# Altium PCB Digital-WeighingScale.PcbDoc
Units mm, origin at the board's own origin, x right, y up, seen from the top; angles counter-clockwise.
Board outline 32.5 x 55 mm, 2 copper layers (Top Layer, Bottom Layer); 16 components, 27 nets, 89 pads, 7 vias.
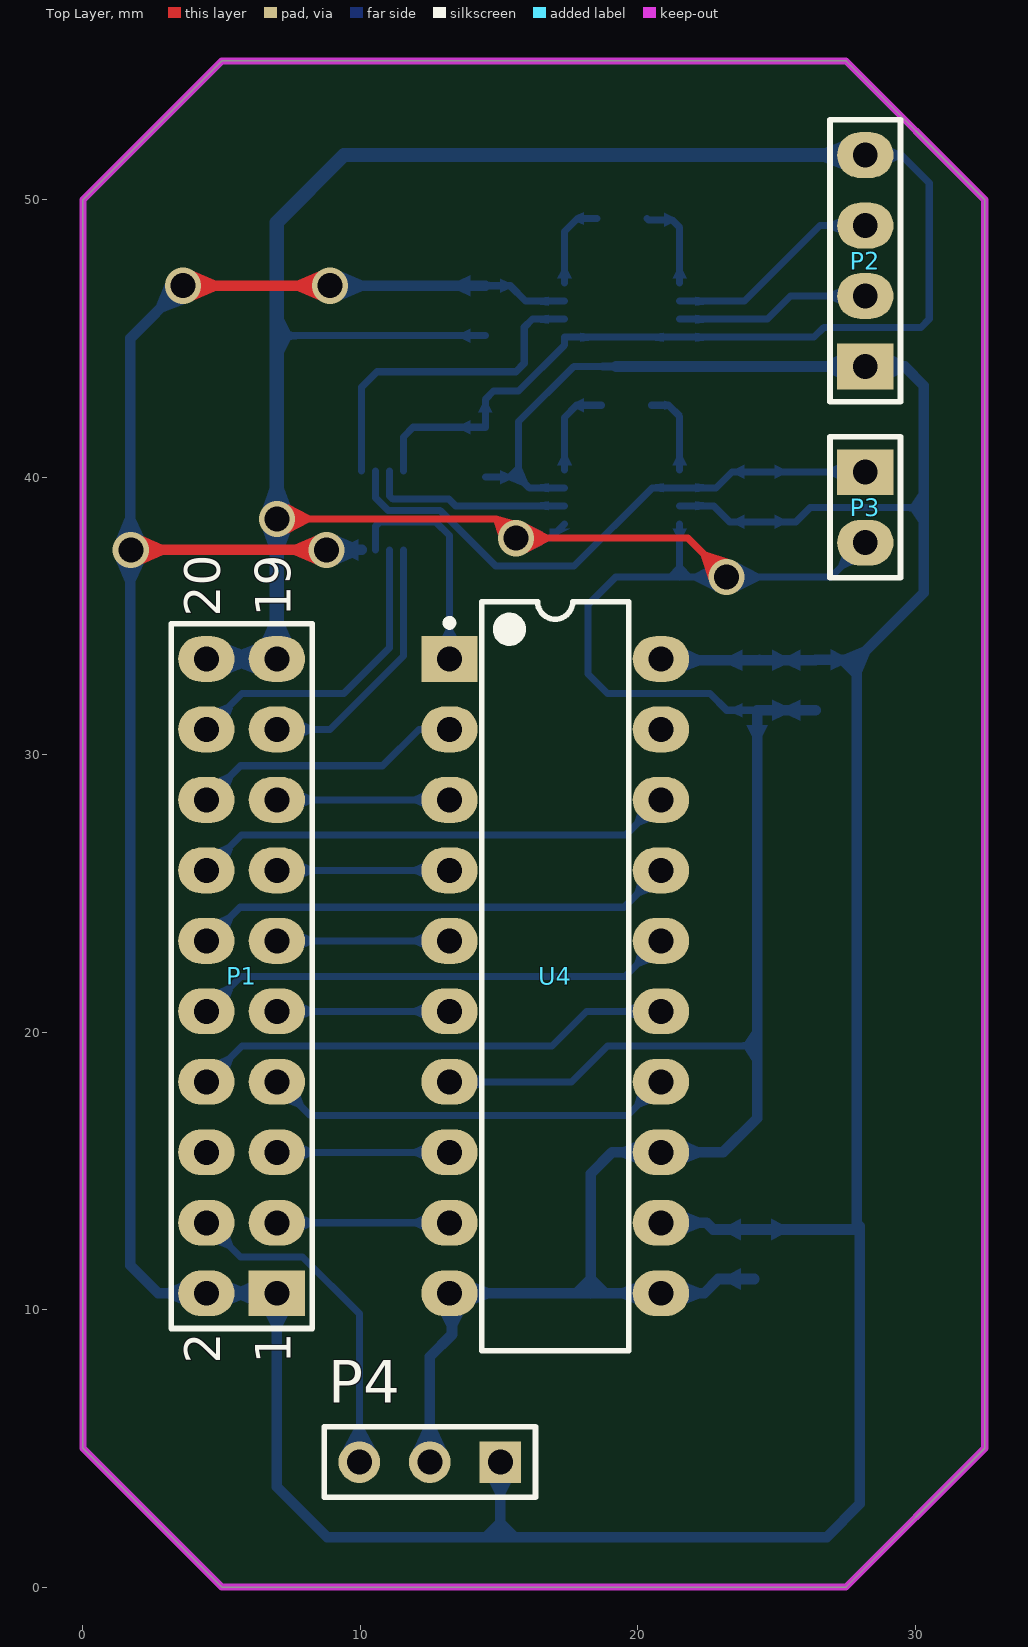
[diagram p0: Top Layer view]
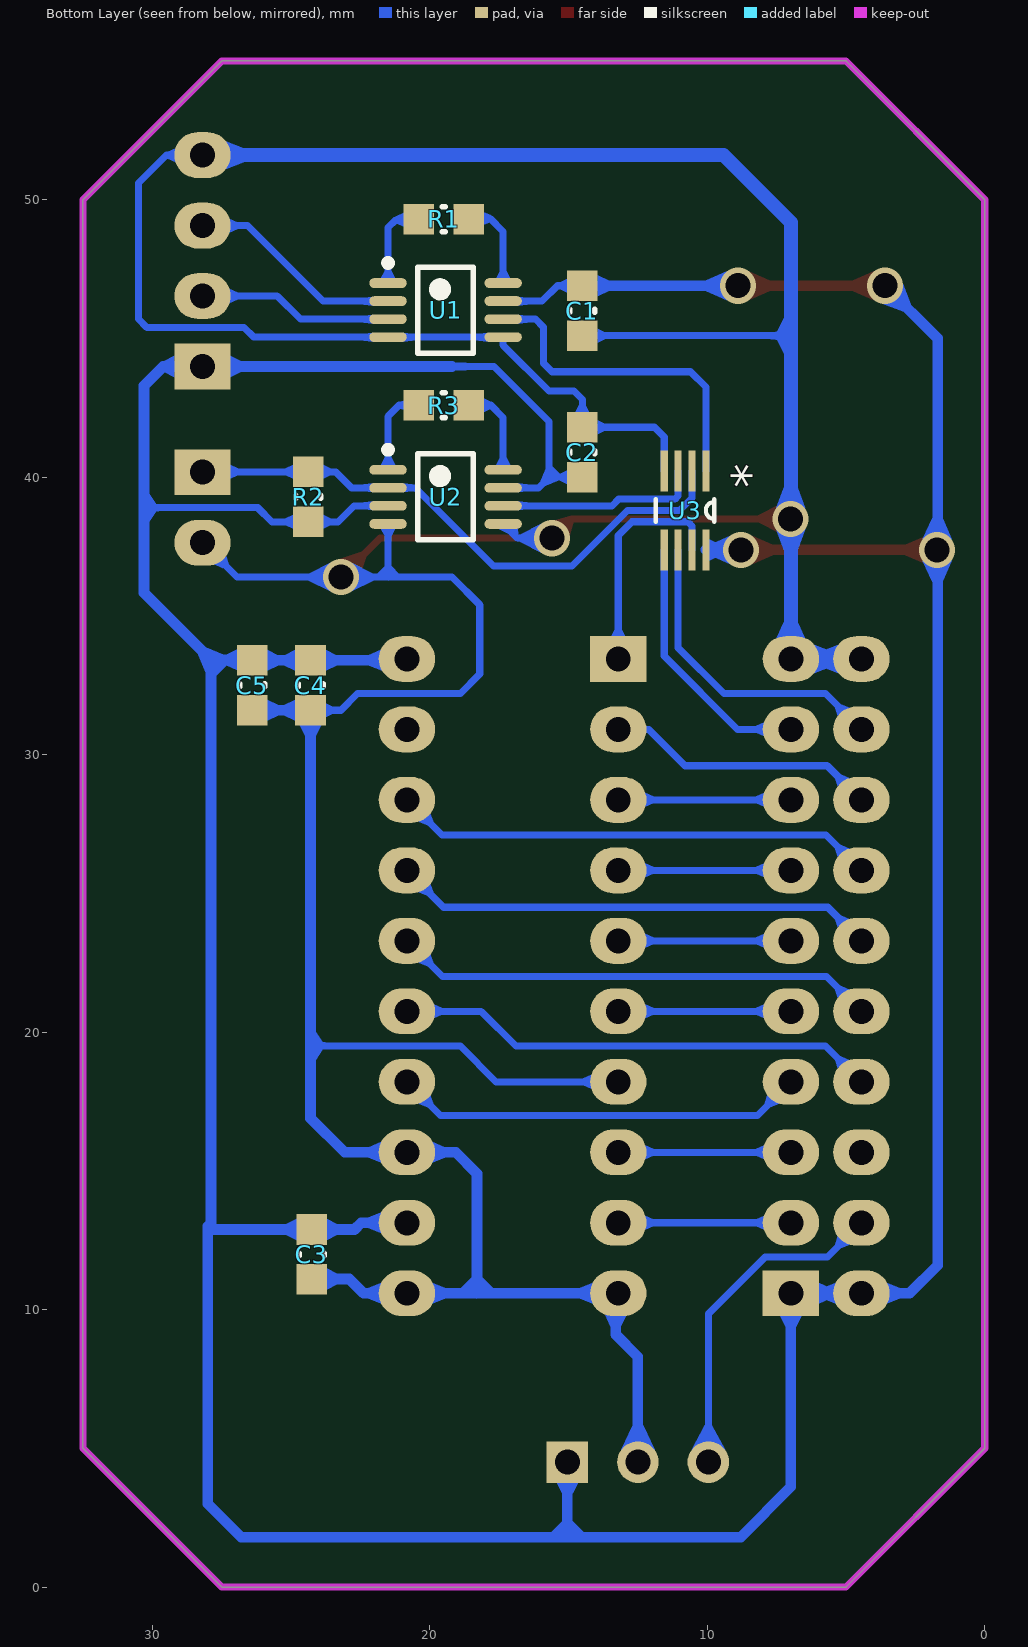
[diagram p1: Bottom Layer view, seen from below]

## Layer stack, top to bottom
Top Solder: solder mask 0.0102, Solder Resist, Dk 3.5
Top Layer: signal copper 0.0356
Dielectric 1: dielectric 0.32, FR-4, Dk 4.8
Bottom Layer: signal copper 0.0356
Bottom Solder: solder mask 0.0102, Solder Resist, Dk 3.5

## Board outline
0,5 5,0 27.5,0 32.5,5 32.5,50 27.5,55 5,55 0,50

## Design rules (kind name [scope] priority, off if disabled: settings)
Clearance Clearance_Edge [OnLayer('Keep-Out Layer')] p1: gap=0.3
Clearance Clearance_Poly [InPolygon] p2: gap=0.2
Clearance [All] p3: gap=0.152
DiffPairsRouting [All] p1: maxlimit=0.381 minlimit=0.152 mostfreqgap=0.2 toplayer_minwidth=0.2 toplayer_maxwidth=0.381 toplayer_prefwidth=0.3 bottomlayer_minwidth=0.2 bottomlayer_maxwidth=0.381 bottomlayer_prefwidth=0.3 maxuncoupledlength=12.7
HoleSize [All] p1: absolutevalues=TRUE maxlimit=6.5 minlimit=0.3 maxpercent=80.000 minpercent=20.000
HoleToHoleClearance [All] p1: gap=0.152 allowstackedmicrovias=TRUE
MinimumSolderMaskSliver [All] p1: minsoldermaskwidth=0.1
PolygonConnect PolygonConnect_1 [(HasFootprint('CAPC1608N') OR HasFootprint('RESC1608N') OR HasFootprint('RESC1005N'))] p1: connectstyle=Relief reliefconductorwidth=0.254 reliefentries=4 polygonreliefangle="90 Angle" airgapwidth=0.254
PolygonConnect [All] p2: connectstyle=Direct reliefconductorwidth=0.254 reliefentries=4 polygonreliefangle="90 Angle" airgapwidth=0.254
RoomDefinition Digital-WeighingScale [InComponentClass('Digital-WeighingScale')] p1: confinementstyle=ConfineIn formatcopy=TRUE lockcomponents=FALSE outline -126.238,-28.147 -75.438,-28.147 -75.438,-2.747 -126.238,-2.747
RoutingVias [All] p1: holewidth=0.3 width=0.6 viastyle="Through Hole" minholewidth=0.3 minwidth=0.6 maxholewidth=0.6 maxwidth=1.2
SilkToSolderMaskClearance [IsPad] p1: minsilkscreentomaskgap=0.152 clearancetoexposedcopper=TRUE
SolderMaskExpansion [All] p1: expansion=0.102
Width [All] p1: maxlimit=0.381 minlimit=0.254 preferedwidth=0.381
25 further rules are at their usual default settings.

## Components (designator, comment, footprint, x,y, rotation, side; value= is the part's Value field where it differs from the comment)
C1 "100nF" CAPC0603(1608)100_M 14.5,46 r90 bottom
C2 "100nF" CAPC0603(1608)100_M 14.5,40.9 r270 bottom
C3 "100nF" CAPC0603(1608)100_M 24.257,11.985 r270 bottom
C4 "100nF" CAPC0603(1608)100_M 24.3,32.5 r270 bottom
C5 "2.2uF" CAPC0603(1608)100_M 26.4,32.5 r270 bottom
P1 "Header 10X2" HDR2X10 6.985,10.588 r90 top
P2 "Header 4" HDR1X4 28.194,43.989 r90 top
P3 "Header 2" HDR1X2 28.194,40.179 r270 top
P4 "Header 3" HDR1X3 15.04,4.5 r180 top
R1 "100K 1%" RESC0603(1608)_M 19.5,49.3 r0 bottom
R2 "100R 0.1%" RESC0603(1608)_M 24.384,39.29 r270 bottom
R3 "10K 0.1%" RESC0603(1608)_M 19.5,42.6 r0 bottom
U1 "INA333AIDGKR" TI-DGK8_L 19.431,46.021 r180 bottom
U2 "INA333AIDGKR" TI-DGK8_L 19.431,39.29 r180 bottom
U3 "TS5A3359_DCU_8" DCU8-M 10.8,38.8 r270 bottom
U4 "TLC0820AIN" TI-N20 17.018,22.018 r0 top

## Footprints (in the part's own frame and the unit in brackets; to place one, negate y for a bottom-side part, rotate by r counter-clockwise, add the part's x,y. Pads: shape width x height; smd on the part's side, far side on the other; paste and mask are expansions set on the pad)
CAPC0603(1608)100_M [mm] "Chip Capacitor, Body 1.6x0.8mm, Height 1.0mm, IPC Low Density"
  rect 1.1x1.1 smd: 1(-0.9,0) 2(0.9,0)
  silkscreen extent -0.05,-0.45 0.05,0.45, body extent -0.87,-0.47 0.88,0.48, height 1
DCU8-M [mil]
  rect 58x10 smd mask+2: 1(-56,29.53) 2(-56,9.84) 3(-56,-9.84) 4(-56,-29.53) 5(56,-29.53) 6(56,-9.84) 7(56,9.84) 8(56,29.53)
  silkscreen extent -16,-41 16,42
HDR1X2 [mil] "Connector; Header; 2 Position"
  rect 65x80 hole 35.43: 1(0,0)
  oval 65x80 hole 35.43: 2(100,0)
  silkscreen extent -50,-50 150,50
HDR1X3 [mm] "Connector; Header; 3 Position"
  rect 1.5x1.5 hole 0.9: 1(0,0)
  round 1.5 hole 0.9: 2(2.54,0) 3(5.08,0)
  silkscreen extent -1.27,-1.27 6.35,1.27
HDR1X4 [mil] "Connector; Header; 4 Position"
  rect 65x80 hole 35.43: 1(0,0)
  oval 65x80 hole 35.43: 2(100,0) 3(200,0) 4(300,0)
  silkscreen extent -50,-50 350,50
HDR2X10 [mil] "Connector; Header; 10x2 Position"
  rect 65x80 hole 35.43: 1(0,0)
  oval 65x80 hole 35.43: 2(0,100) 3(100,0) 4(100,100) 5(200,0) 6(200,100) 7(300,0) 8(300,100) 9(400,0) 10(400,100) 11(500,0) 12(500,100) 13(600,0) 14(600,100) 15(700,0) 16(700,100) 17(800,0) 18(800,100) 19(900,0) 20(900,100)
  silkscreen extent -50,-50 950,150
RESC0603(1608)_M [mm] "Chip Resistor, Body 1.6x0.8mm, IPC Low Density"
  rect 1.1x1.1 smd: 1(-0.9,0) 2(0.9,0)
  silkscreen extent -0.05,-0.45 0.05,0.45, body extent -0.85,-0.47 0.85,0.47, height 0.6
TI-DGK8_L [mm] "SOP, 8-Leads, Body 3.1x3.1mm, Pitch 0.65mm, IPC High Density"
  oval 1.35x0.35 smd: 1(-2.075,0.975) 2(-2.075,0.325) 3(-2.075,-0.325) 4(-2.075,-0.975) 5(2.075,-0.975) 6(2.075,-0.325) 7(2.075,0.325) 8(2.075,0.975)
  silkscreen extent -2.2,-1.55 1,1.82, body extent -1.55,-1.55 1.55,1.55, height 1.1
TI-N20 [mil] "DIP, 20-Leads, Body 25.4x6.35 mm, Pitch 2.54 mm"
  rect 80x65 hole 35.43: 1(-150,450)
  oval 80x65 hole 35.43: 2(-150,350) 3(-150,250) 4(-150,150) 5(-150,50) 6(-150,-50) 7(-150,-150) 8(-150,-250) 9(-150,-350) 10(-150,-450) 11(150,-450) 12(150,-350) 13(150,-250) 14(150,-150) 15(150,-50) 16(150,50) 17(150,150) 18(150,250) 19(150,350) 20(150,450)
  silkscreen extent -155,-531 104,531, body extent -155,-530 155,530, height 200

## Part data
C1 C2 C3 C4: library part CMP-1035-02583-1, "CAP 100nF 16V ?±5% 0603 (1608 Metric) Thickness 1mm SMD"
C5: library part CMP-1035-02583-1, "CAP 2.2uF 16V ?±5% 0603 (1608 Metric) Thickness 1mm SMD"
P1: "Header, 10-Pin, Dual row"
P2: "Header, 4-Pin"
P3: "Header, 2-Pin"
P4: "Header, 3-Pin"
R1 R3: library part CMP-1012-00736-1, "100K 0.1W 1% 0603 (1608 Metric)  SMD"
R2: library part CMP-1012-00510-1, "1K 0.1W 1% 0603 (1608 Metric)  SMD"
U1 U2: library part CMP-0944-00088-1, "Low Power, Precision Instrumentation Amplifier, -40 to 125 degC, 8-pin SOP (DGK8), Green (RoHS & no Sb/Br)"
U3: "Imported"
U4: library part CMP-0003-01709-1, "8-Bit, 392 kSPS ADC Parallel Out, Microprocessor Peripheral, On-Chip Track-and-Hold, Single Channel, -40 to 85 degC, 20-pin DIP (N20), Pb-Free (RoHS)"

## Via types
v1: diameter 1.3, hole 0.9, Top Layer to Bottom Layer, 7 vias

## Nets (pads, with @x,y where several pads share a name; then routed paths per layer and width w, separated by ;. In a path a pad name is that pad's centre, name@x,y a point inside that pad or via, vN(x,y) a via of type N, cw(c..) or ccw(c..) an arc to the next point about the centre after c; other vN are vias at no path point)
5V: C1.2 C2.2 C3.1 C4.1 C5.1 P1.1 P1.2 P2.1 P4.1 R2.2 U1.7 U2.3 U2.7 U3.8 U4.12 U4.20 | length 181.9
  Top Layer w0.381: v1(1.722,37.378) v1(8.778,37.378) ; v1(3.6,46.9) v1(8.9,46.9)
  Bottom Layer w0.254: C2.2 15.7,40 ; C1.2 15.4,46.9 15.954,46.346 U1.7 ; U2.7 16.085,39.615 15.7,40 ; 19.211,43.989 17.689,43.989 15.7,42 15.7,40 ; U2.3 22.735,38.965 23.31,38.39 25.69,38.39 26.2,38.9 30.3,38.9 ; C4.1 C4.1@24.384,33.484
  Bottom Layer w0.381: v1(3.6,46.9) 1.7,45 1.7,11.6 2.712,10.588 P1.2 P1.1 6.985,3.615 8.8,1.8 15.04,1.8 ; v1(8.778,37.378) U3.8 ; v1(8.9,46.9) C1.2 ; P4.1 15.04,1.8 ; 19.211,43.989 P2.1 29.611,43.989 30.3,43.3 30.3,38.9 30.3,35.83 27.885,33.415 ; U4.12 22.472,13.128 22.715,12.885 27.885,12.885 ; U4.20 20.876,33.4 C4.1 C5.1 26.415,33.415 27.885,33.415 ; 15.04,1.8 26.8,1.8 28,3 28,13 27.885,12.885 ; 27.885,12.885 27.885,33.415
ADCIN: U3.7 U4.1 | length 8.2
  Bottom Layer w0.254: U3.7 10.55,38.244 10.7,38.394 12.706,38.394 13.208,37.892 U4.1
AIN1: U1.6 U3.1 | length 12.1
  Bottom Layer w0.254: U3.1@10.045,40.222 10.045,43.245 10.6,43.8 15.6,43.8 15.904,44.104 15.904,45.404 16.196,45.696 U1.6
AIN2: U2.6 U3.3 | length 7.4
  Bottom Layer w0.254: U3.3 11.05,39.325 11.168,39.206 13.194,39.206 13.435,38.965 U2.6
AIN3: P3.1 R2.1 U2.2 U3.2 | length 21
  Bottom Layer w0.254: U3.2 10.55,39.25 11,38.8 12.875,38.8 14.875,36.8 17.7,36.8 20.515,39.615 U2.2 22.815,39.615 23.39,40.19 R2.1 28.183,40.19 P3.1
BIN+: P2.2 U1.3 | length 7
  Bottom Layer w0.254: U1.3 24.667,45.696 25.5,46.529 P2.2
BIN-: P2.3 U1.2 | length 7.8
  Bottom Layer w0.254: U1.2 23.846,46.346 26.569,49.069 P2.3
D0: P1.16 U4.2 | length 9.8
  Bottom Layer w0.254: P1.16 5.677,29.6 10.8,29.6 12.108,30.908 U4.2
D1: P1.15 U4.3 | length 6.2
  Bottom Layer w0.254: P1.15 U4.3
D2: P1.13 U4.4 | length 6.2
  Bottom Layer w0.254: P1.13 U4.4
D3: P1.11 U4.5 | length 6.2
  Bottom Layer w0.254: P1.11 U4.5
D4: P1.7 U4.14 | length 14.8
  Bottom Layer w0.254: P1.7 8.193,17 19.62,17 U4.14
D5: P1.8 U4.15 | length 17.4
  Bottom Layer w0.254: P1.8 5.737,19.5 16.9,19.5 18.148,20.748 U4.15
D6: P1.10 U4.16 | length 17.4
  Bottom Layer w0.254: P1.10 5.697,22 19.54,22 U4.16
D7: P1.12 U4.17 | length 17.4
  Bottom Layer w0.254: P1.12 5.657,24.5 19.5,24.5 U4.17
GND: C1.1 C2.1 C3.2 C4.2 C5.2 P1.19 P1.20 P2.4 P3.2 P4.2 U1.4 U1.5 U2.4 U2.5 U3.4 U4.7 U4.10 U4.11 U4.13 | length 176.5
  Top Layer w0.254: v1(7,38.5) 14.9,38.5 v1(15.6,37.8) 21.8,37.8 v1(23.2,36.4)
  Bottom Layer w0.254: 6.9,45.1 6.985,45.1 C1.1 ; U3.4 11.55,41.45 11.9,41.8 C2.1 14.5,42.8 14.8,43.1 15.7,43.1 17.356,44.756 U1.5 U1.4 26.346,45.046 26.7,45.4 30.2,45.4 30.5,45.7 30.5,50.6 29.491,51.609 P2.4 ; U4.7 17.608,18.208 18.9,19.5 24.3,19.5 ; v1(15.6,37.8) 16.841,37.8 U2.5 ; U2.4 21.506,36.4 ; C4.2 23.2,31.6 22.6,32.2 18.9,32.2 18.2,32.9 18.2,35.4 19.2,36.4 21.506,36.4 ; P3.2 26.955,36.4 v1(23.2,36.4) 21.506,36.4
  Bottom Layer w0.381: P4.2 12.5,8.3 13.3,9.1 U4.10@13.3,10.5 ; U4.10@13.2,10.6 13.212,10.588 18.3,10.588 ; C3.2@24.2,11.1 22.9,11.1 22.388,10.588 U4.11 18.3,10.588 ; C5.2 C4.2 24.3,19.5 24.3,16.9 23.068,15.668 U4.13 19.068,15.668 18.3,14.9 18.3,10.588
  Bottom Layer w0.508: P1.20 P1.19 6.985,45.1 6.985,49.185 9.409,51.609 P2.4
IN1: P1.18 U3.6 | length 11.4
  Bottom Layer w0.254: P1.18 5.737,32.2 9.4,32.2 11.05,33.85 U3.6
IN2: P1.17 U3.5 | length 9.5
  Bottom Layer w0.254: P1.17 8.908,30.908 11.55,33.55 U3.5
INT: P1.3 U4.9 | length 6.2
  Bottom Layer w0.254: P1.3 U4.9
IR: P1.4 P4.3 | length 12.2
  Bottom Layer w0.254: P1.4 5.673,11.9 7.91,11.9 9.96,9.85 P4.3
NetR1_1: R1.1 U1.8 | length 3.2
  Bottom Layer w0.254: U1.8 17.356,48.856 17.823,49.323 R1.1@18.531,49.323
NetR1_2: R1.2 U1.1 | length 3.3
  Bottom Layer w0.254: R1.2@20.331,49.323 20.377,49.277 21.223,49.277 21.506,48.994 U1.1
NetR3_1: R3.1 U2.8 | length 3.4
  Bottom Layer w0.254: U2.8 17.356,42.156 17.792,42.592 R3.1@18.696,42.592
NetR3_2: R3.2 U2.1 | length 3.1
  Bottom Layer w0.254: R3.2@20.496,42.592 21.108,42.592 21.506,42.194 U2.1
OFLW: P1.14 U4.18 | length 17.4
  Bottom Layer w0.254: P1.14 5.717,27.1 19.56,27.1 U4.18
RD: P1.5 U4.8 | length 6.2
  Bottom Layer w0.254: P1.5 U4.8
RDY: P1.9 U4.6 | length 6.2
  Bottom Layer w0.254: P1.9 U4.6
pads on no net: P1.6 U4.19

## Keep-outs
Keep-Out Layer:
  the board outline again, w0.254

## Text inside footprints (layer, text, board x,y; h text height)
P1: Top Overlay "20" at 4.953,34.972 h1.27 r90; Top Overlay "19" at 7.493,34.972 h1.27 r90; Top Overlay "1" at 7.493,8.048 h1.27 r90; Top Overlay "2" at 4.953,8.048 h1.27 r90
U3: Bottom Overlay "*" at 9.669,40.476 h1.27 r90; Mechanical 1 "*" at 9.669,40.476 h1.27 r90